# Altium PCB 01_UNROUTED_PLACEMENT.PcbDoc (part 1 of 4)
Units mil, origin at the board's own origin, x right, y up, seen from the top; angles counter-clockwise.
Board outline 3149.61 x 1771.65 mil, 4 copper layers (L1 TOP, L2 GND, L3 POWER SIGNAL, L4 BOTTOM GND), stack 45.835 mil thick; 209 components, 132 nets, 746 pads, 5 vias.
Unrouted connection lines stored in the file: 533.
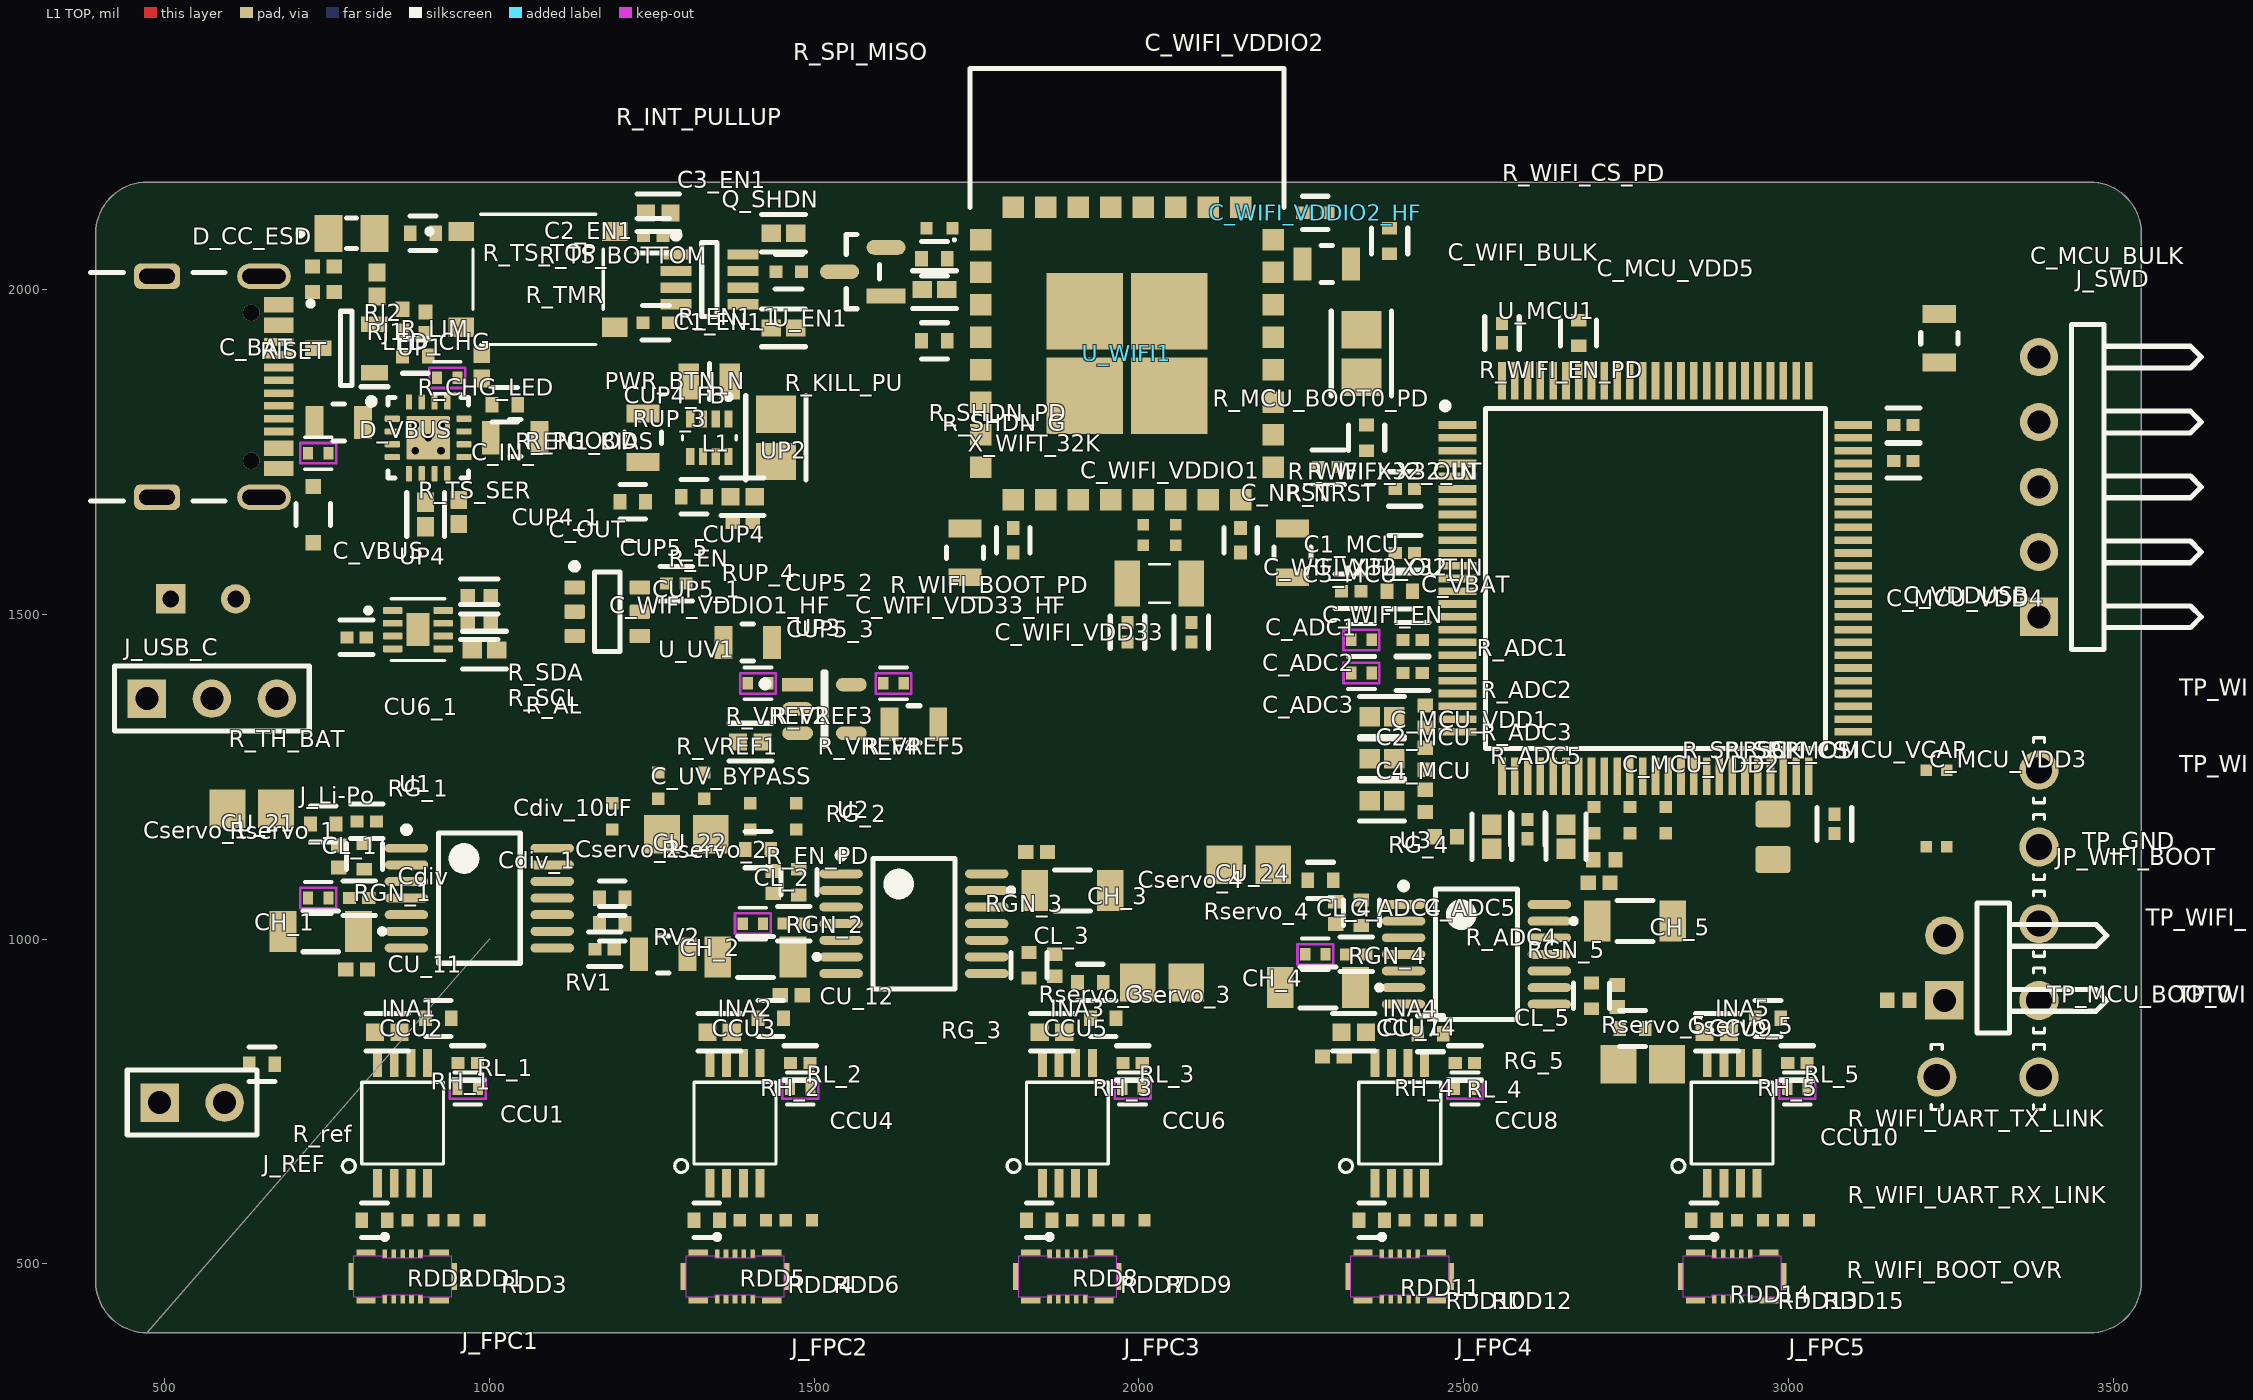
[diagram p0: L1 TOP view]
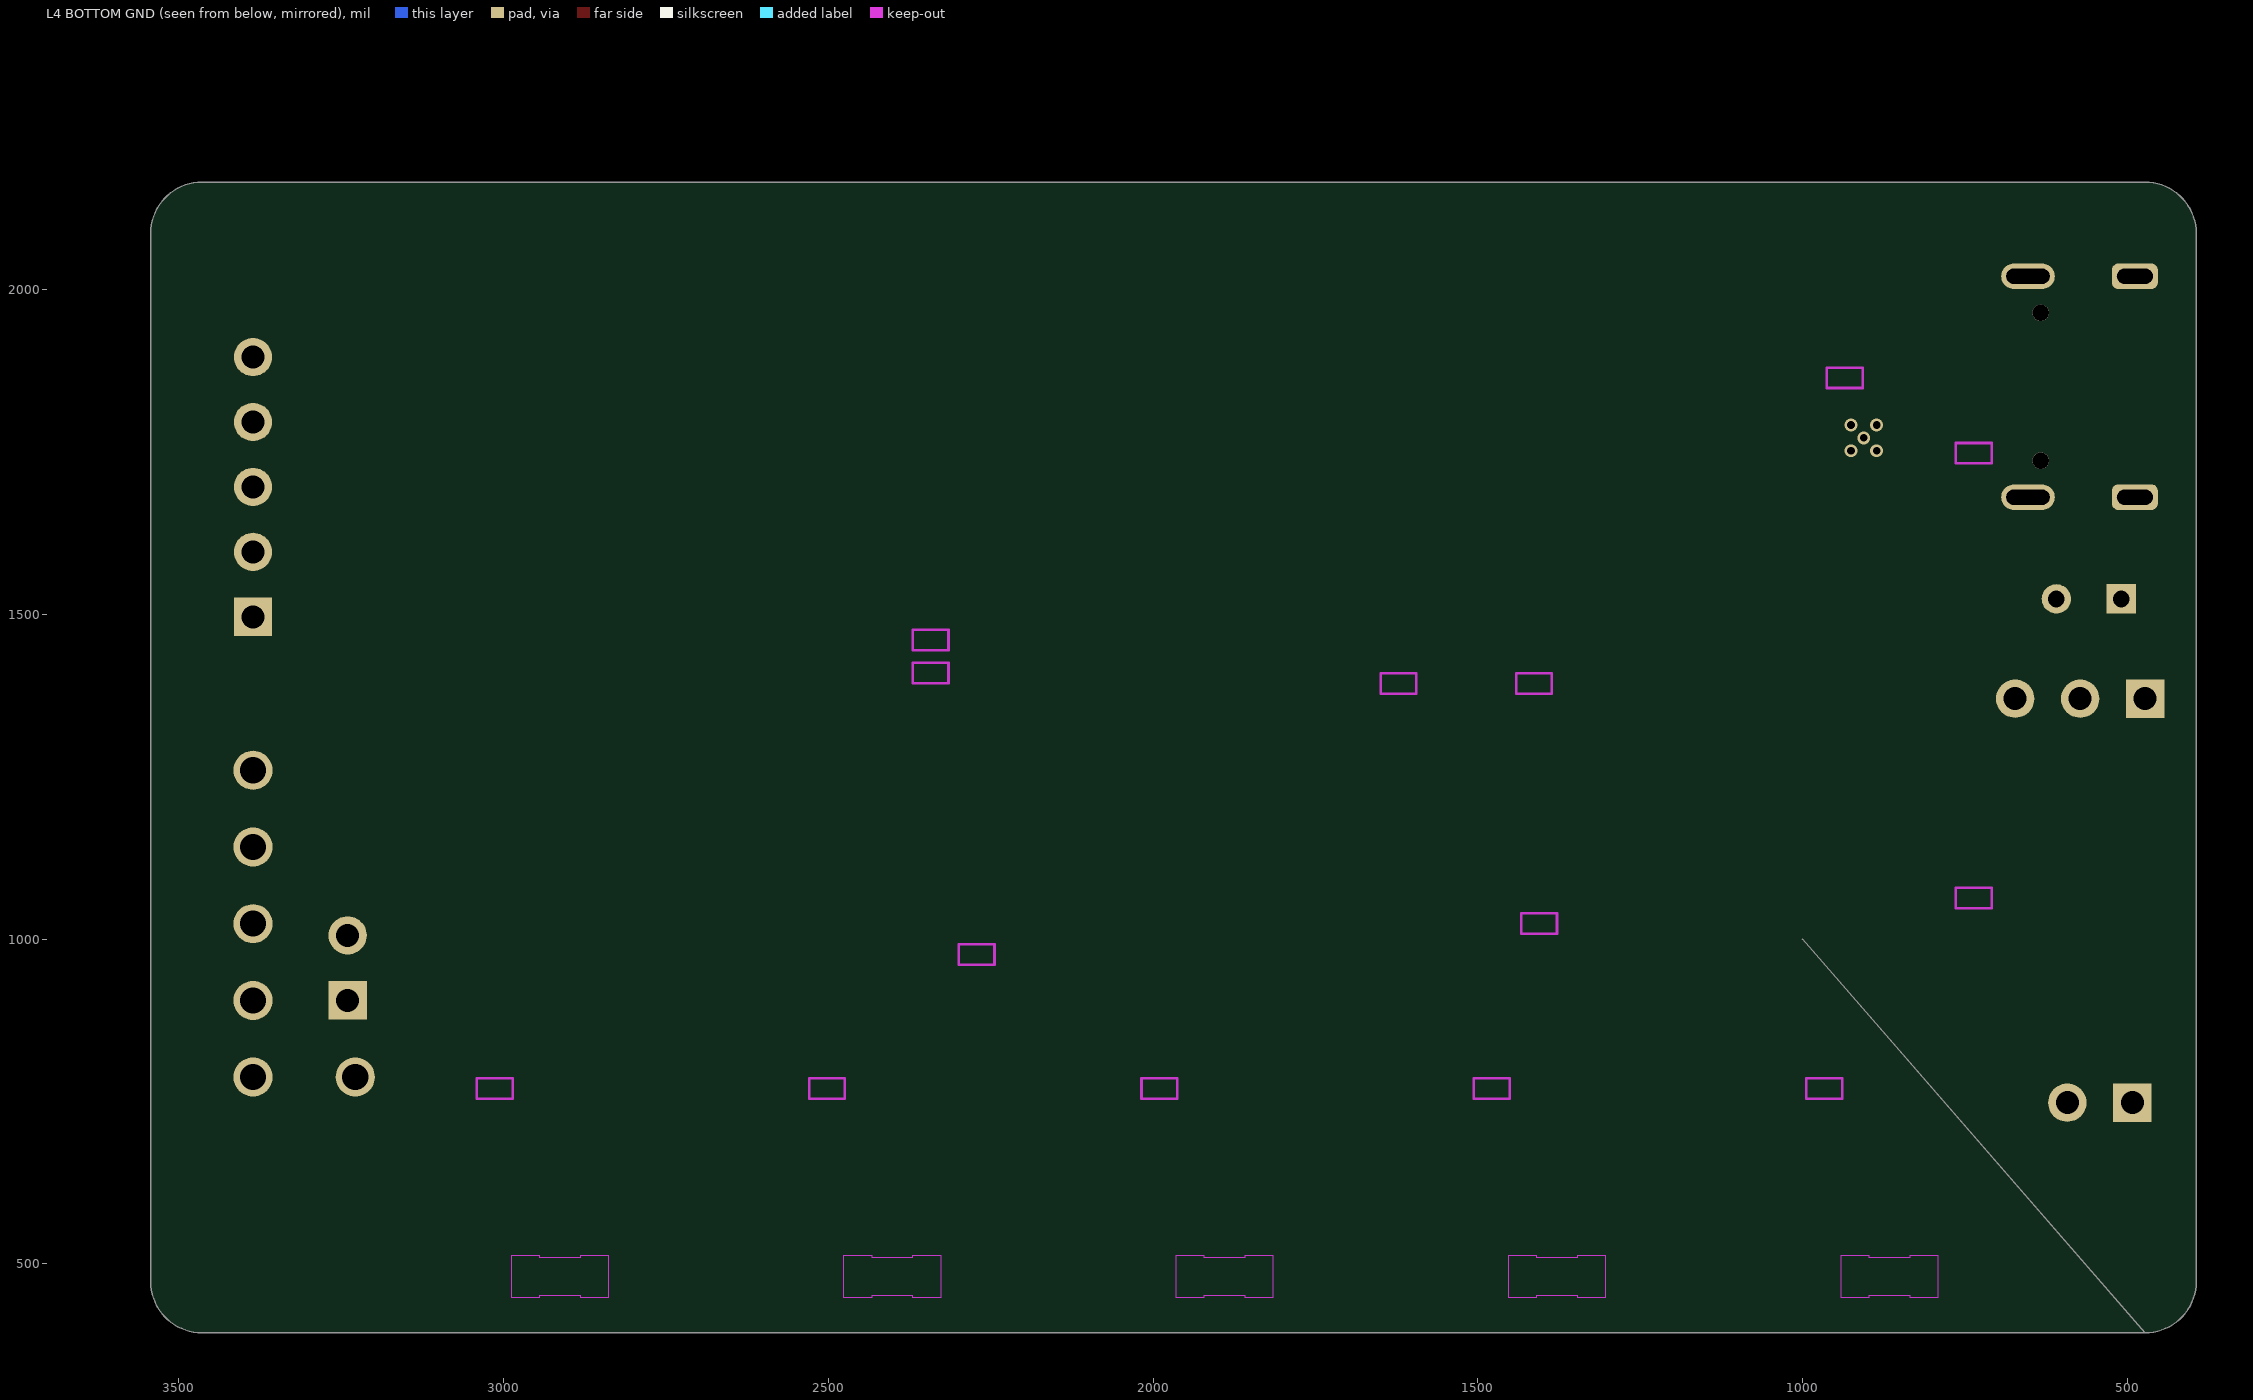
[diagram p1: L4 BOTTOM GND view, seen from below]

## Layer stack, top to bottom
Top Solder: solder mask 0.4, Solder Resist, Dk 3.5
L1 TOP: signal copper 1.378
Dielectric 1: prepreg 3.9134, JLC3313 prepreg, Dk 4.1
L2 GND: signal copper 0.5984
Dielectric2: core 34.0551, JLC core, Dk 4.6
L3 POWER SIGNAL: signal copper 0.5984
Dielectric3: prepreg 3.9134, JLC3313 prepreg, Dk 4.1
L4 BOTTOM GND: signal copper 1.378
Bottom Solder: solder mask 0.4, Solder Resist, Dk 3.5

## Board outline
472.44,393.7 3464.57,393.7 ccw(c3464.57,472.44) 3543.31,472.44 3543.31,2086.61 ccw(c3464.57,2086.61) 3464.57,2165.35 472.44,2165.35 ccw(c472.44,2086.61) 393.7,2086.61 393.7,472.44 ccw(c472.44,472.44) 1000,1000

## Design rules (kind name [scope] priority, off if disabled: settings)
Clearance [All] p1: gap=10 ignorepadtopadclearanceinfootprint=FALSE except(0: Arc-Hole Track-Hole SMDPad-Hole THPad-Hole Via-Hole Fill-Hole Poly-Hole Region-Hole Text-Hole)
PolygonConnect [All] p1: connectstyle=Relief reliefconductorwidth=10 reliefentries=4 polygonreliefangle="90 Angle" airgapwidth=10
RoutingVias [All] p1: holewidth=28 width=50 viastyle="Through Hole" minholewidth=28 minwidth=50 maxholewidth=28 maxwidth=50
SolderMaskExpansion [All] p1: expansion=4 istentingtop=FALSE
Width [All] p1: maxlimit=10 minlimit=10 preferedwidth=10
30 further rules are at their usual default settings.

## Components (designator, comment, footprint, x,y, rotation, side; value= is the part's Value field where it differs from the comment)
C1_EN1 "GRM155R61C104KA88D" FP-GRM155-0_05-IPC_C 1251.97,2082.68 r0 top
C1_MCU "GRM155R61C104KA88D" FP-GRM155-0_05-IPC_C 2421.26,1460.63 r180 top
C2_EN1 "CC0402KRX7R7BB333" FP-CC0402-MFG 1255.91,1948.82 r180 top value="33 nF"
C2_MCU "MURATA_GRM155C71C105KE11D" *MURATA_GRM155C71C105KE11D_0 2342.52,1460.63 r0 top value="1 uF"
C3_EN1 "CC0402KRX5R6BB334" FP-CC0402-MFG 1460.63,2027.56 r180 top value="330 nF"
C3_MCU "GRM155R61C104KA88D" FP-GRM155-0_05-IPC_C 2421.26,1409.45 r180 top
C4_MCU "MURATA_GRM155C71C105KE11D" *MURATA_GRM155C71C105KE11D_0 2342.52,1409.45 r0 top value="1 uF"
C_ADC1 "GRM1555C1E103JE01D" FP-GRM155-0_15-IPC_A 2374.02,1342.52 r180 top
C_ADC2 "GRM1555C1E103JE01D" FP-GRM155-0_15-IPC_A 2374.02,1277.56 r180 top
C_ADC3 "GRM1555C1E103JE01D" FP-GRM155-0_15-IPC_A 2374.02,1212.6 r180 top
C_ADC4 "GRM1555C1E103JE01D" FP-GRM155-0_15-IPC_A 2543.31,1157.48 r270 top
C_ADC5 "GRM1555C1E103JE01D" FP-GRM155-0_15-IPC_A 2657.48,1157.48 r270 top
C_BAT "GCM21BC71E106KE36L" FP-GCM21B-0_2-e0_2_0_7-MFG 767.72,1795.28 r180 top
C_IN_ "GRM155C71C105KE11D" *MURATA_GRM155C71C105KE11D_0 935.04,1864.17 r0 top value="1 uF"
C_MCU_BULK "GCM21BC71E106KE36L" FP-GCM21B-0_2-e0_2_0_7-MFG 3232.28,1925.2 r90 top
C_MCU_VDD1 "GRM155R61C104KA88D" FP-GRM155-0_05-IPC_C 2409.45,1594.49 r0 top
C_MCU_VDD2 "GRM155R61C104KA88D" FP-GRM155-0_05-IPC_C 2598.43,1169.29 r90 top
C_MCU_VDD3 "GRM155R61C104KA88D" FP-GRM155-0_05-IPC_C 3070.87,1177.17 r90 top
C_MCU_VDD4 "GRM155R61C104KA88D" FP-GRM155-0_05-IPC_C 3177.17,1791.34 r0 top
C_MCU_VDD5 "GRM155R61C104KA88D" FP-GRM155-0_05-IPC_C 2559.06,1933.07 r90 top
C_NRST "GRM155R61C104KA88D" FP-GRM155-0_05-IPC_C 2326.77,1535.43 r180 top
C_OUT_ "GCM21BC71E106KE36L" FP-GCM21B-0_2-e0_2_0_7-MFG 1039.37,1771.65 r0 top
C_UV_BYPASS "GRM155R61C104KA88D" FP-GRM155-0_05-IPC_C 1287.4,1547.24 r0 top
C_VBAT "GRM155R61C104KA88D" FP-GRM155-0_05-IPC_C 2409.45,1692.91 r0 top
C_VBUS "GRM155C71C105KE11D" *MURATA_GRM155C71C105KE11D_0 736.22,1748.03 r0 top value="1 uF"
C_VDDUSB "GRM155R61C104KA88D" FP-GRM155-0_05-IPC_C 3177.17,1736.22 r0 top
C_WIFI_BULK "GRM219R60J476ME44D" FP-GRM219-0_2-0_1-IPC_A 2342.52,1901.57 r90 top
C_WIFI_EN "GRM155R61C104KA88D" FP-GRM155-0_05-IPC_C 2291.34,1726.57 r0 top
C_WIFI_VDD33 "GCM21BC71E106KE36L" FP-GCM21B-0_2-e0_2_0_7-MFG 2236.22,1594.49 r270 top
C_WIFI_VDD33_HF "GRM155R61C104KA88D" FP-GRM155-0_05-MFG 2156.5,1614.17 r270 top
C_WIFI_VDDIO1 "GCM21BC71E106KE36L" FP-GCM21B-0_2-e0_2_0_7-MFG 1732.28,1594.49 r90 top
C_WIFI_VDDIO1_HF "GRM155R61C104KA88D" FP-GRM155-0_05-MFG 1806.5,1614.17 r270 top
C_WIFI_VDDIO2 "GCM21BC71E106KE36L" FP-GCM21B-0_2-e0_2_0_7-MFG 2289.37,2039.37 r180 top
C_WIFI_VDDIO2_HF "GRM155R61C104KA88D" FP-GRM155-0_05-MFG 2271.65,2118.11 r180 top
C_WIFI_X32_IN "DNP" FP-GRM155-0_05-IPC_C 2080.71,1472.44 r90 top value="DNP - tuning"
C_WIFI_X32_OUT "DNP" FP-GRM155-0_05-IPC_C 1982.28,1472.44 r90 top value="DNP - tuning"
CCU1 "GRM155R61C104KA88D" FP-GRM155-0_05-IPC_C 966.54,809.06 r0 top
CCU2 "MURATA_GRM155C71C105KE11D" *MURATA_GRM155C71C105KE11D_0 966.54,769.68 r180 top value="1 uF"
CCU3 "MURATA_GRM155C71C105KE11D" *MURATA_GRM155C71C105KE11D_0 1478.35,769.68 r180 top value="1 uF"
CCU4 "GRM155R61C104KA88D" FP-GRM155-0_05-IPC_C 1478.35,809.06 r0 top
CCU5 "MURATA_GRM155C71C105KE11D" *MURATA_GRM155C71C105KE11D_0 1990.16,769.68 r180 top value="1 uF"
CCU6 "GRM155R61C104KA88D" FP-GRM155-0_05-IPC_C 1990.16,809.06 r0 top
CCU7 "MURATA_GRM155C71C105KE11D" *MURATA_GRM155C71C105KE11D_0 2501.97,769.68 r180 top value="1 uF"
CCU8 "GRM155R61C104KA88D" FP-GRM155-0_05-IPC_C 2501.97,809.06 r0 top
CCU9 "MURATA_GRM155C71C105KE11D" *MURATA_GRM155C71C105KE11D_0 3013.78,769.68 r180 top value="1 uF"
CCU10 "GRM155R61C104KA88D" FP-GRM155-0_05-IPC_C 3013.78,809.06 r0 top
Cdiv "GRM155R61C104KA88D" FP-GRM155-0_05-IPC_C 811.02,1181.1 r0 top
Cdiv_1 "GRM155R61C104KA88D" FP-GRM155-0_05-IPC_C 1177.17,984.25 r180 top
Cdiv_10uF "GCM21BC71E106KE36L" FP-GCM21B-0_2-e0_2_0_7-MFG 1267.72,976.38 r180 top
CH_1 "GRM1555C1H392GE01D" CAPC1005X55N 767.72,1126.97 r270 top
CH_2 "GRM1555C1H392GE01D" CAPC1005X55N 1437.01,1087.6 r270 top
CH_3 "GRM1555C1H392GE01D" CAPC1005X55N 1870.08,959.65 r90 top
CH_4 "GRM1555C1H392GE01D" CAPC1005X55N 2303.15,1040.35 r270 top
CH_5 "GRM1555C1H392GE01D" CAPC1005X55N 2736.22,912.4 r90 top
CL_1 "GRM21BR71C824KA01L" CAPC2013X135X45ML10T25 633.86,1200.79 r0 top
CL_2 "GRM21BR71C824KA01L" CAPC2013X135X45ML10T25 1303.15,1161.42 r0 top
CL_3 "GRM21BR71C824KA01L" CAPC2013X135X45ML10T25 2035.43,933.07 r180 top
CL_4 "GRM21BR71C824KA01L" CAPC2013X135X45ML10T25 2169.29,1114.17 r0 top
CL_5 "GRM21BR71C824KA01L" CAPC2013X135X45ML10T25 2775.59,807.09 r180 top
Cservo_1 "GRM31CR71E335KA88L" GRM31x 740.16,1011.81 r180 top
Cservo_2 "GRM31CR71E335KA88L" GRM31x 1409.45,972.44 r180 top
Cservo_3 "GRM31CR71E335KA88L" GRM31x 1897.64,1074.8 r0 top
Cservo_4 "GRM31CR71E335KA88L" GRM31x 2275.59,925.2 r180 top
Cservo_5 "GRM31CR71E335KA88L" GRM31x 2763.78,1027.56 r0 top
CU6_1 "GRM155R61C104KA88D" FP-GRM155-0_05-IPC_C 795.28,1464.57 r0 top
CU_11 "GRM155R61C104KA88D" FP-GRM155-0_05-IPC_C 799.21,1062.99 r0 top
CU_12 "GRM155R61C104KA88D" FP-GRM155-0_05-IPC_C 1468.5,1023.62 r0 top
CU_14 "GRM155R61C104KA88D" FP-GRM155-0_05-IPC_C 2334.65,976.38 r0 top
CU_21 "MURATA_GRM155C71C105KE11D" *MURATA_GRM155C71C105KE11D_0 736.22,1062.99 r180 top value="1 uF"
CU_22 "MURATA_GRM155C71C105KE11D" *MURATA_GRM155C71C105KE11D_0 1405.51,1023.62 r180 top value="1 uF"
CU_24 "MURATA_GRM155C71C105KE11D" *MURATA_GRM155C71C105KE11D_0 2271.65,976.38 r180 top value="1 uF"
CUP4 "GRM219R60J476ME44D" FP-GRM219-0_2-0_1-IPC_A 1440.94,1771.65 r270 top
CUP4_1 "GCM21BC71E106KE36L" FP-GCM21B-0_2-e0_2_0_7-MFG 1236.22,1771.65 r270 top
CUP4_FB "GRM1555C1H100JA01D" CAPC1005X55X25LL05T10 1389.76,1641.73 r180 top
CUP5_1 "GRM155C71C105KE11D" *MURATA_GRM155C71C105KE11D_0 1413.39,1393.7 r180 top value="1 uF"
CUP5_2 "GRM155C71C105KE11D" *MURATA_GRM155C71C105KE11D_0 1622.05,1393.7 r180 top value="1 uF"
CUP5_3 "GCM21BC71E106KE36L" FP-GCM21B-0_2-e0_2_0_7-MFG 1653.54,1330.71 r180 top
CUP5_5 "GCM21BC71E106KE36L" FP-GCM21B-0_2-e0_2_0_7-MFG 1397.64,1456.69 r180 top
D_CC_ESD "PESD5V0X2UTR" SOT95P230X100-3N 779.53,1909.45 r180 top
D_VBUS "PESD5V0S1BA,115" FP-SOD323-CA-MFG 728.35,1653.54 r90 top
INA1 "AD8237ARMZ" EMG_AD8237_R3_MSOP8 866.14,716.54 r0 top
INA2 "AD8237ARMZ" EMG_AD8237_R3_MSOP8 1377.95,716.54 r0 top
INA3 "AD8237ARMZ" EMG_AD8237_R3_MSOP8 1889.76,716.54 r0 top
INA4 "AD8237ARMZ" EMG_AD8237_R3_MSOP8 2401.57,716.54 r0 top
INA5 "AD8237ARMZ" EMG_AD8237_R3_MSOP8 2913.39,716.54 r0 top
J_FPC1 "BK13C06-10DS/2-0.35V(895)" HIROSE_BK13C06-10DS/2-0.35V(895) 866.14,480.31 r0 top
J_FPC2 "BK13C06-10DS/2-0.35V(895)" HIROSE_BK13C06-10DS/2-0.35V(895) 1377.95,480.31 r0 top
J_FPC3 "BK13C06-10DS/2-0.35V(895)" HIROSE_BK13C06-10DS/2-0.35V(895) 1889.76,480.31 r0 top
J_FPC4 "BK13C06-10DS/2-0.35V(895)" HIROSE_BK13C06-10DS/2-0.35V(895) 2401.57,480.31 r0 top
J_FPC5 "BK13C06-10DS/2-0.35V(895)" HIROSE_BK13C06-10DS/2-0.35V(895) 2913.39,480.31 r0 top
J_Li-Po "Header 3" HDR1X3 472.44,1370.08 r0 top
J_REF "REFERENCE ELECTRODE:" HDR1X2 492.13,748.03 r0 top
J_SWD "Header 5H" HDR1X5H 3385.83,1496.06 r90 top
J_USB_C "USB4105-GF-A-060" GCT_USB4105-GF-A-060 488.19,1850.39 r270 top
JP_WIFI_BOOT "Header 2H" HDR1X2H 3240.16,905.51 r90 top
L1 "DFE21CCN1R0MELL" FP-DFE21CC_EL-MFG 1338.58,1858.27 r180 top
LED_CHG "SML-LXT0805SRW-TR" LEDC2012X120N 787.4,2086.61 r0 top
MCU_VCAP "CL21A475KOFNNNE" CAPC2012X135N 2976.38,1157.48 r90 top
PWR_BTN_N "TS-1187A-B-A-B" SW_TS-1187A-B-A-B 1074.8,2015.75 r0 top
Q_SHDN "BSS138" FP-318-08-IPC_B 1574.8,2027.56 r180 top
R_ADC1 "0402WGF3300TCE" RESC1005X40N 2440.94,1342.52 r90 top
R_ADC2 "0402WGF3300TCE" RESC1005X40N 2440.94,1277.56 r90 top
R_ADC3 "0402WGF3300TCE" RESC1005X40N 2440.94,1212.6 r90 top
R_ADC4 "0402WGF3300TCE" RESC1005X40N 2472.44,1157.48 r0 top
R_ADC5 "0402WGF3300TCE" RESC1005X40N 2716.54,1122.05 r180 top
R_AL "AT0402DRD0710KL" FP-AT0402-IPC_A 992.13,1444.88 r0 top
R_CHG_LED "AC0402FR-071K5L" FP-AC0402-MFG 897.64,2086.61 r0 top
R_EN "AC0402FR-7D100KL" FP-AC0402-MFG 1220.47,1673.23 r0 top value=100KΩ
R_EN1_1 "RC0402FR-071KL" FP-RC0402-0_4-IPC_A 1259.84,2118.11 r0 top
R_EN1_BIAS "AT0402DRD0710KL" FP-AT0402-IPC_A 901.57,1653.54 r90 top
R_EN_PD "AC0402FR-071ML" FP-AC0402-IPC_A 1401.57,1303.15 r0 top
R_INT_PULLUP "AT0402DRD0710KL" FP-AT0402-IPC_A 1452.76,1940.94 r180 top
R_KILL_PU "AT0402DRD0710KL" FP-AT0402-IPC_A 1452.76,2086.61 r0 top
R_LIM "AC0402FR-073K48L" FP-AC0402-MFG 1023.62,1822.83 r180 top
R_MCU_BOOT0_PD "RT0402BRD0710KL" FP-RT0402-MFG 2677.17,1933.07 r270 top value=10KΩ
R_NRST "RT0402BRD0710KL" FP-RT0402-MFG 2401.57,1535.43 r180 top value=10KΩ
R_PGOOD "RC0402FR-0747KL" RESC1005X40X25ML05T10 952.76,1657.48 r90 top
R_ref "AC0402FR-7D100KL" FP-AC0402-MFG 649.61,807.09 r0 top value=100KΩ
R_SCL "CRCW04024K70FKED" FP-CRCW0402-e3-IPC_B 984.25,1488.19 r0 top
R_SDA "CRCW04024K70FKED" FP-CRCW0402-e3-IPC_B 984.25,1527.56 r0 top
R_SHDN_G "AT0402DRD0710KL" FP-AT0402-IPC_A 1685.04,2000 r0 top
R_SHDN_PD "AC0402FR-7D100KL" FP-AC0402-MFG 1685.04,2047.24 r0 top value=100KΩ
R_SPI_CS "ERJ2RKF22R0X" RES_ERJ2RKF22R0X 2811.02,1183.07 r90 top
R_SPI_MISO "ERJ2RKF22R0X" RES_ERJ2RKF22R0X 1692.91,2094.49 r180 top
R_SPI_MOSI "ERJ2RKF22R0X" RES_ERJ2RKF22R0X 2755.91,1183.07 r90 top
R_SPI_SCK "ERJ2RKF22R0X" RES_ERJ2RKF22R0X 2700.79,1183.07 r90 top
R_TH_BAT "103AT-2" EMG_REMOTE_NTC_TERMINALS_2P 559.06,1523.62 r0 top
R_TMR "RC0402FR-0768K1L" RESC1005X40X25ML05T10 988.19,1881.89 r90 top
R_TS_BOTTOM "RC0402FR-0728KL" RESC1005X40X25NL05T10 901.57,1948.82 r90 top
R_TS_SER "AC0402FR-7D100KL" FP-AC0402-MFG 885.83,1897.64 r0 top value=100KΩ
R_TS_TOP "RC0402FR0733K2L" RESC1005X40X25NL05T10 866.14,1952.76 r90 top
R_VREF1 "ERA2AEB680X" RES_ERA2AEB680X 1188.98,1188.98 r90 top
R_VREF2 "ERA2AEB680X" RES_ERA2AEB680X 1259.84,1236.22 r90 top
R_VREF3 "ERA2AEB680X" RES_ERA2AEB680X 1330.71,1236.22 r90 top
R_VREF4 "ERA2AEB680X" RES_ERA2AEB680X 1401.57,1188.98 r90 top
R_VREF5 "ERA2AEB680X" RES_ERA2AEB680X 1472.44,1188.98 r90 top
R_WIFI_BOOT_OVR "0402WGF1001TCE" RESC1005X40N 3169.29,905.51 r0 top
R_WIFI_BOOT_PD "RT0402BRD0710KL" FP-RT0402-MFG 1685.04,1921.26 r0 top value=10KΩ
R_WIFI_CS_PD "RT0402BRD0710KL" FP-RT0402-MFG 2385.83,2074.8 r90 top value=10KΩ
R_WIFI_EN_PD "RT0402BRD0710KL" FP-RT0402-MFG 2350.39,1771.65 r90 top value=10KΩ
R_WIFI_UART_RX_LINK "ERJ2GE0R00X" RESC1005X40X25LL05T05 3228.35,1141.73 r0 top
R_WIFI_UART_TX_LINK "ERJ2GE0R00X" RESC1005X40X25LL05T05 3228.35,1259.84 r0 top
R_WIFI_X32_IN "ERJ2GE0R00X" RESC1005X40X25LL05T05 2056.5,1622.05 r90 top
R_WIFI_X32_OUT "ERJ2GE0R00X" RESC1005X40X25LL05T05 2006.5,1622.05 r90 top
RDD1 "ERA2ARB103X" RES_ERA2ARB103X 893.7,566.93 r0 top
RDD2 "AR02BTC5001" FP-AC0402-MFG 822.83,566.93 r0 top value=5KΩ
RDD3 "ERA2ARB103X" RES_ERA2ARB103X 964.57,566.93 r0 top
RDD4 "ERA2ARB103X" RES_ERA2ARB103X 1405.51,566.93 r0 top
RDD5 "AR02BTC5001" FP-AC0402-MFG 1334.65,566.93 r0 top value=5KΩ
RDD6 "ERA2ARB103X" RES_ERA2ARB103X 1476.38,566.93 r0 top
RDD7 "ERA2ARB103X" RES_ERA2ARB103X 1917.32,566.93 r0 top
RDD8 "AR02BTC5001" FP-AC0402-MFG 1846.46,566.93 r0 top value=5KΩ
RDD9 "ERA2ARB103X" RES_ERA2ARB103X 1988.19,566.93 r0 top
RDD10 "ERA2ARB103X" RES_ERA2ARB103X 2429.13,566.93 r0 top
RDD11 "AR02BTC5001" FP-AC0402-MFG 2358.27,566.93 r0 top value=5KΩ
RDD12 "ERA2ARB103X" RES_ERA2ARB103X 2500,566.93 r0 top
RDD13 "ERA2ARB103X" RES_ERA2ARB103X 2940.94,566.93 r0 top
RDD14 "AR02BTC5001" FP-AC0402-MFG 2870.08,566.93 r0 top value=5KΩ
RDD15 "ERA2ARB103X" RES_ERA2ARB103X 3011.81,566.93 r0 top
RG_1 "RT0402BRD0780K6L" FP-RT0402-MFG 807.09,1126.97 r90 top value=80.6KΩ
RG_2 "RT0402BRD0780K6L" FP-RT0402-MFG 1476.38,1087.6 r90 top value=80.6KΩ
RG_3 "RT0402BRD0780K6L" FP-RT0402-MFG 1830.71,959.65 r270 top value=80.6KΩ
RG_4 "RT0402BRD0780K6L" FP-RT0402-MFG 2342.52,1040.35 r90 top value=80.6KΩ
RG_5 "RT0402BRD0780K6L" FP-RT0402-MFG 2696.85,912.4 r270 top value=80.6KΩ
RGN_1 "RT0402BRD0710KL" FP-RT0402-MFG 744.09,1177.17 r0 top value=10KΩ
RGN_2 "RT0402BRD0710KL" FP-RT0402-MFG 1413.39,1137.8 r0 top value=10KΩ
RGN_3 "RT0402BRD0710KL" FP-RT0402-MFG 1925.2,933.07 r180 top value=10KΩ
RGN_4 "RT0402BRD0710KL" FP-RT0402-MFG 2279.53,1090.55 r0 top value=10KΩ
RGN_5 "RT0402BRD0710KL" FP-RT0402-MFG 2759.84,862.2 r180 top value=10KΩ
RH_1 "ERA-2AEB2612X" FP-AC0402-IPC_A 842.52,856.3 r0 top
RH_2 "ERA-2AEB2612X" FP-AC0402-IPC_A 1354.33,856.3 r0 top
RH_3 "ERA-2AEB2612X" FP-AC0402-IPC_A 1866.14,856.3 r0 top
RH_4 "ERA-2AEB2612X" FP-AC0402-IPC_A 2330.71,856.3 r0 top
RH_5 "ERA-2AEB2612X" FP-AC0402-IPC_A 2889.76,856.3 r0 top
RISET "RC0402FR-072K94L" RESC1005X40X25ML05T10 826.77,2007.87 r270 top
RJ1 "RC0402FR-075K1L" RESC1005X40X25NL05T10 744.09,1996.06 r0 top
RJ2 "RC0402FR-075K1L" RESC1005X40X25NL05T10 744.09,2035.43 r0 top
RL_1 "RT0402BRD071K07L" FP-RT0402-MFG 921.26,877.95 r0 top value=1.07KΩ
RL_2 "RT0402BRD071K07L" FP-RT0402-MFG 1433.07,877.95 r0 top value=1.07KΩ
RL_3 "RT0402BRD071K07L" FP-RT0402-MFG 1944.88,877.95 r0 top value=1.07KΩ
RL_4 "RT0402BRD071K07L" FP-RT0402-MFG 2448.82,854.33 r0 top value=1.07KΩ
RL_5 "RT0402BRD071K07L" FP-RT0402-MFG 2968.5,877.95 r0 top value=1.07KΩ
Rservo_1 "RC0402FR-072ML" RESC1005X40X25NL05T10 795.28,952.76 r180 top
Rservo_2 "RC0402FR-072ML" RESC1005X40X25NL05T10 1464.57,913.39 r180 top
Rservo_3 "RC0402FR-072ML" RESC1005X40X25NL05T10 1842.52,1133.86 r0 top
Rservo_4 "RC0402FR-072ML" RESC1005X40X25NL05T10 2299.21,818.9 r180 top
Rservo_5 "RC0402FR-072ML" RESC1005X40X25NL05T10 2708.66,1086.61 r0 top
RUP_3 "AC0402FR-07560KL" FP-AC0402-IPC_A 1389.76,1681.1 r180 top
RUP_4 "AC0402FR-7D100KL" FP-AC0402-MFG 1314.96,1681.1 r0 top value=100KΩ
RV1 "AC0402FR-7D100KL" FP-AC0402-MFG 1188.98,1023.62 r180 top value=100KΩ
RV2 "AC0402FR-7D100KL" FP-AC0402-MFG 1188.98,1062.99 r0 top value=100KΩ
TP_GND "5021" TP_5021 3385.83,1023.62 r90 top
TP_MCU_BOOT0 "5021" TP_5021 3228.35,787.4 r90 top
TP_WIFI_BOOT "5021" TP_5021 3385.83,905.51 r90 top
TP_WIFI_CHIP_EN "5021" TP_5021 3385.83,787.4 r90 top
TP_WIFI_UART_RX "5021" TP_5021 3385.83,1259.84 r90 top
TP_WIFI_UART_TX "5021" TP_5021 3385.83,1141.73 r90 top
U1 "MCP6404T-E/ST" TSSOP-ST14_N 984.25,1062.99 r0 top
U2 "MCP6404T-E/ST" TSSOP-ST14_N 1653.54,1023.62 r0 top
U3 "MCP6404T-E/ST" TSSOP-ST14_N 2519.68,976.38 r0 top
U_EN1 "LTC2954ITS8-1#TRMPBF" LT-TS8-8-TSOT-23_V 1338.58,2015.75 r0 top
U_MCU1 "STM32U575VIT6" QFP50P1600X1600X160-100N 2795.28,1555.12 r0 top
U_UV1 "TPS3808G33DBVR" DBV0006A_L 1181.1,1503.94 r0 top
U_WIFI1 "ST67W611M1A6BTR" ST67W611M1A6BTR 1968.5,2000 r0 top
UP1 "BQ24072TRGTR" RGT0016C_V 905.51,1771.65 r0 top
UP2 "TPS631000DRLR" SOT50P160X60-8N 1338.58,1771.65 r270 top
UP3 "TPS7A2030PDBVR" FP-DBV0005A-IPC_C 1515.75,1354.33 r0 top
UP4 "MAX17048G+T10" SON50P200X200X80-9N 889.76,1476.38 r0 top
X_WIFI_32K "Q13FC13500003" EMG_FC135_3215_2P 2031.5,1547.24 r180 top value="32.768 kHz"

## Footprints (in the part's own frame and the unit in brackets; to place one, negate y for a bottom-side part, rotate by r counter-clockwise, add the part's x,y. Pads: shape width x height; smd on the part's side, far side on the other; paste and mask are expansions set on the pad)
*MURATA_GRM155C71C105KE11D_0 [mm]
  rect 0.4x0.5 smd: 1(-0.4,0) 2(0.4,0)
  Keep-Out Layer lines w0.1: -0.7,-0.4 0.7,-0.4 ; -0.7,-0.4 -0.7,0.4 ; -0.7,-0.4 0.7,-0.4 ; -0.7,-0.4 -0.7,0.4 ; -0.7,-0.4 0.7,-0.4 ; -0.7,-0.4 -0.7,0.4 ; -0.7,0.4 0.7,0.4 ; -0.7,0.4 0.7,0.4 ; -0.7,0.4 0.7,0.4 ; 0.7,-0.4 0.7,0.4 ; 0.7,-0.4 0.7,0.4 ; 0.7,-0.4 0.7,0.4
  silkscreen extent -0.53,-0.63 0.53,0.63
CAPC1005X55N [mm]
  rect 0.54x0.6 smd paste+0 mask+0.102: 1(-0.432,0) 2(0.432,0)
  body extent -0.5,-0.25 0.5,0.25, height 0.55
CAPC1005X55X25LL05T10 [mm] "Chip Capacitor, 2-Leads, Body 1.00x0.50mm, IPC High Density"
  rect 0.56x0.52 smd: 1(-0.39,0) 2(0.39,0)
  body extent -0.53,-0.28 0.53,0.28, height 0.55
CAPC2012X135N [mm]
  rrect25% 1.05x1.38 smd paste+0 mask+0.102: 1(-0.888,0) 2(0.888,0)
  body extent -1,-0.63 1,0.63, height 1.35
CAPC2013X135X45ML10T25 [mm] "Chip Capacitor, 2-Leads, Body 2.00x1.25mm, IPC Low Density"
  rect 1.4x1.5 smd: 1(-0.95,0) 2(0.95,0)
  body extent -1.05,-0.67 1.05,0.67, height 1.35
DBV0006A_L [mm] "SOT23, 6-Leads, Body 3.05x1.75mm, Pitch 0.95mm, IPC High Density"
  rrect18% 0.8x0.55 smd: 1(-1.275,0.95) 2(-1.275,0) 3(-1.275,-0.95) 4(1.275,-0.95) 5(1.275,0) 6(1.275,0.95)
  silkscreen extent -1.4,-1.55 0.5,1.9, body extent -1.42,-1.46 1.42,1.46, height 1.11
EMG_AD8237_R3_MSOP8 [mm] "AD8237ARMZ RM-8; numeric pin mapping 1-8; R3 2026-09-12; geometry retained from inspected source"
  rect 0.35x1.1 smd mask+0.05: 1(-0.975,-2.35) 2(-0.325,-2.35) 3(0.325,-2.35) 4(0.975,-2.35) 5(0.975,2.35) 6(0.325,2.35) 7(-0.325,2.35) 8(-0.975,2.35)
  silkscreen extent -2.36,-1.93 1.6,1.6, body extent -2.45,-1.5 2.45,1.5, height 1.1
EMG_FC135_3215_2P [mm] "Epson Q13FC13500003 FC-135, 3.2x1.5mm, two numeric pads; preserved 1.0x1.8mm lands at 2.5mm pitch"
  rect 1x1.8 smd: 1(-1.25,0) 2(1.25,0)
  silkscreen extent -0.4,-0.75 0.4,0.75, body extent 0,0 0,0
EMG_REMOTE_NTC_TERMINALS_2P [mm] "Wire-termination provision ONLY. Copper/drill copied unchanged from FP-103AT-2-MFG. Remote sensor body excluded; wire fit and strain relief require qualification."
  rect 1.15x1.15 hole 0.65 paste-1000 mask+0: 1(-1.27,0)
  round 1.15 hole 0.65 paste-1000 mask+0: 2(1.27,0)
FP-318-08-IPC_B [mm]
  rect 1.524x0.578 smd paste+0 mask+0: 1(-0.91,0.95)
  rrect100% 1.524x0.578 smd paste+0 mask+0: 2(-0.91,-0.95) 3(0.91,0)
  silkscreen extent -0.65,-1.45 0.65,1.45, body extent -1.92,-1.7 1.92,1.7, height 0.25
FP-AC0402-IPC_A [mil]
  rect 28.16x26.48 smd paste+0 mask+0: 1(-18.84,0) 2(18.84,0)
  silkscreen extent -33,-29 33,29, body extent -41,-21 41,21, height 10
FP-AC0402-MFG [mm]
  rect 0.5x0.6 smd paste+0 mask+0: 1(-0.5,0) 2(0.5,0)
  silkscreen extent -0.5,-0.67 0.5,0.67, body extent -0.85,-0.4 0.85,0.4, height 0.25
FP-AT0402-IPC_A [mil]
  rect 29.91x26.48 smd paste+0 mask+0: 1(-18.75,0) 2(18.75,0)
  silkscreen extent -34,-29 34,29, body extent -42,-21 42,21, height 10
FP-CC0402-MFG [mm]
  rect 0.5x0.5 smd paste+0 mask+0: 1(-0.5,0) 2(0.5,0)
  silkscreen extent -0.53,-0.68 0.53,0.67, body extent -0.87,-0.48 0.87,0.48, height 0.25
FP-CRCW0402-e3-IPC_B [mil]
  rect 22.37x22.54 smd paste+0 mask+0: 1(-17.8,0) 2(17.8,0)
  silkscreen extent -29,-27 29,27, body extent -35,-17 35,17, height 10
FP-DBV0005A-IPC_C [mm]
  rect 1.205x0.532 smd paste+0 mask+0: 1(-1.05,0.95)
  rrect100% 1.205x0.532 smd paste+0 mask+0: 2(-1.05,0) 3(-1.05,-0.95) 4(1.05,-0.95) 5(1.05,0.95)
  silkscreen extent -2.45,-1.45 0.05,1.45, body extent -1.75,-1.55 1.75,1.55, height 0.25
FP-DFE21CC_EL-MFG [mm]
  rect 0.8x1.4 smd paste+0 mask+0: 1(0.8,0) 2(-0.8,0)
  silkscreen extent 0,-0.7 0,0.7, body extent -1.3,-0.8 1.3,0.8, height 0.25
FP-GCM21B-0_2-e0_2_0_7-MFG [mm]
  rect 0.7x1.3 smd paste+0 mask+0: 1(-0.95,0) 2(0.95,0)
  silkscreen extent -0.23,-0.72 0.23,0.72, body extent -1.4,-0.82 1.4,0.82, height 0.25
FP-GRM155-0_05-IPC_C [mil]
  rect 20.29x18.6 smd paste+0 mask+0: 1(-14.9,0) 2(14.9,0)
  silkscreen extent -25,-27 25,27, body extent -29,-15 29,15, height 10
FP-GRM155-0_05-MFG [mm]
  rect 0.55x0.5 smd paste+0 mask+0: 1(-0.475,0) 2(0.475,0)
  silkscreen extent -0.5,-0.65 0.5,0.65, body extent -0.85,-0.38 0.85,0.38, height 0.25
FP-GRM155-0_15-IPC_A [mil]
  rect 31.66x29.85 smd paste+0 mask+0: 1(-18.78,0) 2(18.78,0)
  silkscreen extent -35,-31 35,31, body extent -42,-23 42,23, height 10
FP-GRM219-0_2-0_1-IPC_A [mil]
  rect 57.27x61.27 smd paste+0 mask+0: 1(-36.45,0) 2(36.45,0)
  silkscreen extent -65,-46 65,46, body extent -85,-50 85,50, height 10
FP-RC0402-0_4-IPC_A [mil]
  rect 28.16x26.48 smd paste+0 mask+0: 1(-18.84,0) 2(18.84,0)
  silkscreen extent -33,-29 33,29, body extent -41,-21 41,21, height 10
FP-RT0402-MFG [mm]
  rect 0.5x0.6 smd paste+0 mask+0: 1(-0.5,0) 2(0.5,0)
  silkscreen extent -0.5,-0.71 0.5,0.7, body extent -0.85,-0.4 0.85,0.4, height 0.25
FP-SOD323-CA-MFG [mm]
  rect 0.6x0.6 smd paste-1000 mask+0: 1(-1.1,0) 2(1.1,0)
  silkscreen extent -0.43,-0.67 0.43,0.67, body extent -1.53,-0.82 1.53,0.82, height 0.25
GCT_USB4105-GF-A-060 [mm]
  rect 0.6x1.15 smd: A1_B12(-3.2,4.755) A4_B9(-2.4,4.755) B1_A12(3.2,4.755) B4_A9(2.4,4.755)
  rect 0.3x1.15 smd: A5(-1.25,4.755) A6(-0.25,4.755) A7(0.25,4.755) A8(1.25,4.755) B5(1.75,4.755) B6(0.75,4.755) B7(-0.75,4.755) B8(-1.75,4.755)
  oval 1x2.1 hole 0.6 slot 1.7 at 90 deg: SH1(-4.32,4.18) SH2(4.32,4.18)
  rrect50% 1x1.8 hole 0.6 slot 1.4 at 90 deg: SH3(-4.32,0) SH4(4.32,0)
  round 0.65 hole 0.65 unplated: ""(-2.89,3.68) ""(2.89,3.68)
  silkscreen extent -4.47,-2.6 4.47,6.1, body extent -4.47,-2.6 4.47,5.11, height 3.31
GRM31x [mm] "Murata GRM31CR71E335KA88L 3.3uF 25V X7R 1206; maximum component height 1.8mm; existing lands unchanged"
  rect 1.05x1.6 smd: 1(-1.475,0) 2(1.475,0)
  silkscreen extent -2.5,-0.8 0.7,0.8, body extent -1.6,-0.8 1.6,0.8, height 1
HDR1X2 [mm] "Connector; Header; 2 Position"
  rect 1.5x1.5 hole 0.9: 1(0,0)
  round 1.5 hole 0.9: 2(2.54,0)
  silkscreen extent -1.27,-1.27 3.81,1.27
HDR1X2H [mm] "Connector; Header; 2 Position; Right Angle"
  rect 1.5x1.5 hole 0.9: 1(0,0)
  round 1.5 hole 0.9: 2(2.54,0)
  silkscreen extent -1.27,-6.35 3.81,-1.27
HDR1X3 [mm] "Connector; Header; 3 Position"
  rect 1.5x1.5 hole 0.9: 1(0,0)
  round 1.5 hole 0.9: 2(2.54,0) 3(5.08,0)
  silkscreen extent -1.27,-1.27 6.35,1.27
HDR1X5H [mm] "Connector; Header; 5 Position; Right Angle"
  rect 1.5x1.5 hole 0.9: 1(0,0)
  round 1.5 hole 0.9: 2(2.54,0) 3(5.08,0) 4(7.62,0) 5(10.16,0)
  silkscreen extent -1.27,-6.35 11.43,-1.27
HIROSE_BK13C06-10DS/2-0.35V(895) [mm]
  rect 0.18x0.325 smd paste+0 mask+0.05: 1(-0.7,0.887) 2(-0.35,0.887) 3(0,0.887) 4(0.35,0.887) 5(0.7,0.887) 6(-0.7,-0.887) 7(-0.35,-0.887) 8(0,-0.887) 9(0.35,-0.887) 10(0.7,-0.887)
  rect 0.75x0.235 smd paste+0 mask+0.102: P1_1(-1.435,0.933) P1_3(-1.435,-0.933) P2_1(1.435,0.933) P2_3(1.435,-0.933)
  rect 0.215x1.04 smd paste+0 mask+0.102: P1_2(-2.015,0) P2_2(2.015,0)
  Keep-Out Layer region: 1.907,-0.815 0.79,-0.815 0.79,-0.725 -0.79,-0.725 -0.79,-0.815 -1.907,-0.815 -1.907,0.815 -0.79,0.815 -0.79,0.725 0.79,0.725 0.79,0.815 1.907,0.815
  silkscreen extent -0.8,1.45 -0.6,1.65
LEDC2012X120N [mm]
  rect 1.1x1.45 smd: A(0.9,0) C(-0.9,0)
  silkscreen extent -2.1,-0.6 0.2,0.6, body extent -1,-0.65 1,0.65, height 0.9
LT-TS8-8-TSOT-23_V [mm] "SOT23, 8-Leads, Body 2.9x1.75mm, Pitch 0.65mm"
  rect 1.22x0.4 smd: 1(-1.31,0.975) 2(-1.31,0.325) 3(-1.31,-0.325) 4(-1.31,-0.975) 5(1.31,-0.975) 6(1.31,-0.325) 7(1.31,0.325) 8(1.31,0.975)
  silkscreen extent -1.43,-1.45 0.3,1.85, body extent -0.87,-1.45 0.88,1.45, height 1
QFP50P1600X1600X160-100N [mm]
  rect 1.475x0.3 smd: 1(-7.738,6) 2(-7.738,5.5) 3(-7.738,5) 4(-7.738,4.5) 5(-7.738,4) 6(-7.738,3.5) 7(-7.738,3) 8(-7.738,2.5) 9(-7.738,2) 10(-7.738,1.5) 11(-7.738,1) 12(-7.738,0.5) 13(-7.738,0) 14(-7.738,-0.5) 15(-7.738,-1) 16(-7.738,-1.5) 17(-7.738,-2) 18(-7.738,-2.5) 19(-7.738,-3) 20(-7.738,-3.5) 21(-7.738,-4) 22(-7.738,-4.5) 23(-7.738,-5) 24(-7.738,-5.5) 25(-7.738,-6) 51(7.738,-6) 52(7.738,-5.5) 53(7.738,-5) 54(7.738,-4.5) 55(7.738,-4) 56(7.738,-3.5) 57(7.738,-3) 58(7.738,-2.5) 59(7.738,-2) 60(7.738,-1.5) 61(7.738,-1) 62(7.738,-0.5) 63(7.738,0) 64(7.738,0.5) 65(7.738,1) 66(7.738,1.5) 67(7.738,2) 68(7.738,2.5) 69(7.738,3) 70(7.738,3.5) 71(7.738,4) 72(7.738,4.5) 73(7.738,5) 74(7.738,5.5) 75(7.738,6)
  rect 0.3x1.475 smd: 26(-6,-7.738) 27(-5.5,-7.738) 28(-5,-7.738) 29(-4.5,-7.738) 30(-4,-7.738) 31(-3.5,-7.738) 32(-3,-7.738) 33(-2.5,-7.738) 34(-2,-7.738) 35(-1.5,-7.738) 36(-1,-7.738) 37(-0.5,-7.738) 38(0,-7.738) 39(0.5,-7.738) 40(1,-7.738) 41(1.5,-7.738) 42(2,-7.738) 43(2.5,-7.738) 44(3,-7.738) 45(3.5,-7.738) 46(4,-7.738) 47(4.5,-7.738) 48(5,-7.738) 49(5.5,-7.738) 50(6,-7.738) 76(6,7.738) 77(5.5,7.738) 78(5,7.738) 79(4.5,7.738) 80(4,7.738) 81(3.5,7.738) 82(3,7.738) 83(2.5,7.738) 84(2,7.738) 85(1.5,7.738) 86(1,7.738) 87(0.5,7.738) 88(0,7.738) 89(-0.5,7.738) 90(-1,7.738) 91(-1.5,7.738) 92(-2,7.738) 93(-2.5,7.738) 94(-3,7.738) 95(-3.5,7.738) 96(-4,7.738) 97(-4.5,7.738) 98(-5,7.738) 99(-5.5,7.738) 100(-6,7.738)
  silkscreen extent -8.35,-6.65 6.65,6.87, body extent -8.1,-8.1 8.1,8.1, height 1.6
RES_ERA2AEB680X [mm]
  rect 0.475x0.5 smd: 1(-0.512,0) 2(0.512,0)
RES_ERA2ARB103X [mm]
  rect 0.475x0.5 smd: 1(-0.512,0) 2(0.512,0)
RES_ERJ2RKF22R0X [mm]
  rect 0.475x0.5 smd: 1(-0.512,0) 2(0.512,0)
  body extent -0.5,-0.25 0.5,0.25, height 0.35
RESC1005X40N [mm]
  rect 0.56x0.6 smd: 1(-0.435,0) 2(0.435,0)
  body extent -0.5,-0.25 0.5,0.25, height 0.35
RESC1005X40X25LL05T05 [mm] "Chip Resistor, 2-Leads, Body 1.05x0.55mm, IPC High Density"
  rect 0.45x0.45 smd: 1(-0.4,0) 2(0.4,0)
  body extent -0.53,-0.28 0.53,0.28, height 0.4
RESC1005X40X25ML05T10 [mm] "Chip Resistor, 2-Leads, Body 1.00x0.50mm, IPC Low Density"
  rect 0.7x0.65 smd: 1(-0.475,0) 2(0.475,0)
  body extent -0.53,-0.27 0.53,0.28, height 0.4
RESC1005X40X25NL05T10 [mm] "Chip Resistor, 2-Leads, Body 1.00x0.50mm, IPC Medium Density"
  rect 0.6x0.55 smd: 1(-0.425,0) 2(0.425,0)
  body extent -0.53,-0.27 0.53,0.28, height 0.4
RGT0016C_V [mm] "QFN, 16-Leads, Body 3x3mm, Pitch 0.5mm, Thermal Pad 1.65x1.65mm"
  rrect40% 0.6x0.25 smd: 1(-1.4,0.75) 2(-1.4,0.25) 3(-1.4,-0.25) 4(-1.4,-0.75) 9(1.4,-0.75) 10(1.4,-0.25) 11(1.4,0.25) 12(1.4,0.75)
  rrect40% 0.25x0.6 smd: 5(-0.75,-1.4) 6(-0.25,-1.4) 7(0.25,-1.4) 8(0.75,-1.4) 13(0.75,1.4) 14(0.25,1.4) 15(-0.25,1.4) 16(-0.75,1.4)
  rrect6% 1.55x1.55 on Top Paste: 17(0,0)
  rrect6% 1.7x1.7 smd paste-0.85: 17(0,0)
  silkscreen extent -2.35,-1.57 1.57,1.58, body extent -1.5,-1.5 1.5,1.5, height 1
SON50P200X200X80-9N [mm]
  rrect25% 0.76x0.27 smd: 1(-0.985,0.75) 2(-0.985,0.25) 3(-0.985,-0.25) 4(-0.985,-0.75) 5(0.985,-0.75) 6(0.985,-0.25) 7(0.985,0.25) 8(0.985,0.75)
  rect 0.9x1.3 smd paste-2: 9(0,0)
  silkscreen extent -2.04,-1.2 1.05,1.2, body extent -1,-1 1,1, height 0.8
SOT50P160X60-8N [mm]
  rect 0.66x0.32 smd mask+0.05: 1(-0.735,0.75) 2(-0.735,0.25) 3(-0.735,-0.25) 4(-0.735,-0.75) 5(0.735,-0.75) 6(0.735,-0.25) 7(0.735,0.25) 8(0.735,0.75)
  silkscreen extent -1.7,-1.05 0.09,1.05, body extent -0.8,-1.05 0.8,1.05, height 0.6
SOT95P230X100-3N [mm]
  rect 1.05x0.6 smd: 1(-1.1,0.95) 2(-1.1,-0.95) 3(1.1,0)
  silkscreen extent -1.63,-1.45 0.23,1.5, body extent -1.2,-1.45 1.2,1.45, height 0.95
ST67W611M1A6BTR [mm]
  rect 0.847x0.847 smd: 1(-5.386,1.945) 2(-5.386,0.675) 3(-5.386,-0.595) 4(-5.386,-1.865) 5(-5.386,-3.135) 6(-5.386,-4.405) 7(-5.386,-5.675) 8(-5.386,-6.945) 9(-4.115,-8.216) 10(-2.845,-8.216) 11(-1.575,-8.216) 12(-0.305,-8.216) 13(0.965,-8.216) 14(2.235,-8.216) 15(3.505,-8.216) 16(4.775,-8.216) 17(6.046,-6.945) 18(6.046,-5.675) 19(6.046,-4.405) 20(6.046,-3.135) 21(6.046,-1.865) 22(6.046,-0.595) 23(6.046,0.675) 24(6.046,1.945) 25(4.775,3.216) 26(3.505,3.216) 27(2.235,3.216) 28(0.965,3.216) 29(-0.305,3.216) 30(-1.575,3.216) 31(-2.845,3.216) 32(-4.115,3.216)
  rect 3x3 smd: 33(-1.32,-4.15) 34(1.98,-4.15) 35(1.98,-0.85) 36(-1.32,-0.85)
  silkscreen extent -6.47,1.9 6.47,8.64, body extent -5.85,-8.64 6.43,8.64, height 2.4
SW_TS-1187A-B-A-B [mm]
  rect 1x0.75 smd: A(-3,1.875) B(3,1.875) C(-3,-1.875) D(3,-1.875)
  silkscreen extent -4.35,-2.55 2.55,2.55
TP_5021 [mm]
  round 1.53 hole 1.02: TP(0,0)
  silkscreen extent -1.27,-0.22 1.27,0.22, body extent -1.27,-0.22 1.27,0.22, height 5.08
TSSOP-ST14_N [mm] "TSOP, 14-Leads, Body 5x4.4mm, Pitch 0.65mm, IPC Medium Density"
  oval 1.7x0.35 smd: 1(-2.85,1.95) 2(-2.85,1.3) 3(-2.85,0.65) 4(-2.85,0) 5(-2.85,-0.65) 6(-2.85,-1.3) 7(-2.85,-1.95) 8(2.85,-1.95) 9(2.85,-1.3) 10(2.85,-0.65) 11(2.85,0) 12(2.85,0.65) 13(2.85,1.3) 14(2.85,1.95)
  silkscreen extent -2.97,-2.55 1.6,2.8, body extent -2.25,-2.55 2.25,2.55, height 1.2

## Part data
C1_EN1: library part EMG_R5_C1_EN1, "CAP CER 0.1UF 16V X5R 0402", Capacitance=100nF, Case Code (Imperial)=0402, Case Code (Metric)=1005, Dielectric=X5R, Max Operating Temperature=85°C, Min Operating Temperature=-55°C, Package Quantity=1, Tolerance=10%, Voltage=16V, Case/Package=0402, Construction=Flat, Controlled Revision="R5 2026-09-16; project-local frozen symbol/footprint", Depth=0.5mm, Height=0.5mm, Lead Free="Lead Free", Length=1mm, Mount="Surface Mount", Packaging="Tape and Reel", Radiation Hardening=No, REACH SVHC="No SVHC", RoHS Compliant=Yes, Series=GRM, Size=0.5mm, Termination=SMD/SMT, Thickness=0.022inch, Voltage Rating=16V, Voltage Rating (DC)=16V, Width=0.02inch
C1_MCU: library part EMG_R5_C1_MCU, "CAP CER 0.1UF 16V X5R 0402", Capacitance=100nF, Case Code (Imperial)=0402, Case Code (Metric)=1005, Dielectric=X5R, Max Operating Temperature=85°C, Min Operating Temperature=-55°C, Package Quantity=1, Tolerance=10%, Voltage=16V, Case/Package=0402, Construction=Flat, Controlled Revision="R5 2026-09-16; project-local frozen symbol/footprint", Depth=0.5mm, Height=0.5mm, Lead Free="Lead Free", Length=1mm, Mount="Surface Mount", Packaging="Tape and Reel", Radiation Hardening=No, REACH SVHC="No SVHC", RoHS Compliant=Yes, Series=GRM, Size=0.5mm, Termination=SMD/SMT, Thickness=0.022inch, Voltage Rating=16V, Voltage Rating (DC)=16V, Width=0.02inch
C2_EN1: library part EMG_R5_C2_EN1, "CAP CER 0.033UF 16V X7R 0402", Capacitance="33 nF", Manufacturer=YAGEO, Package=CC0402, Temperature="-55°C to +125°C", Temperature Characteristic=X7R, Temperature Coefficient=30ppm/°C, Temperature Range High=+125°C, Temperature Range Low=-55°C, Tolerance=0.1, Voltage Rating="16 V", Automotive=No, Automotive Grade=NA, Category=Cap, ComponentLink2Description=Datasheet, ComponentLink2URL=http://www.yageo.com/documents/recent/UPY-GP_NP0_16V-to-50V_16.pdf, Controlled Revision="R5 2026-09-16; project-local frozen symbol/footprint", Device Class L1="Passive Components", Device Class L2=Capacitors, Device Class L3="Ceramic Capacitors", Digikey Description="CAP CER 0.033UF 16V X7R 0402", Footprint Url=http://www.yageo.com/exep/pages/download/literatures/UPY-C_GEN_24.pdf, Height=0.55mm, Ipc Land Pattern Name=CAPC10050X50, Lead Free=Yes, Manufacturer Part Number=CC0402KRX7R7BB333, Material=Ceramic, Mouser Description="Multilayer Ceramic Capacitors MLCC - SMD/SMT 33nF 16V X7R 10%", Octopart=https://octopart.com/cc0402krx7r7bb333-yageo-9289202, RoHS=TRUE
C2_MCU: library part EMG_R5_C2_MCU, "Murata GRM155C71C105KE11D: 1 uF 16 V X7S +/-10%, 0402/1005 metric", Capacitance="1 uF", Dielectric=X7S, Manufacturer=Murata, Manufacturer Part Number=GRM155C71C105KE11D, Package="0402 / 1005 metric", Tolerance=+/-10%, Voltage Rating="16 V", Check_prices=https://www.snapeda.com/parts/GRM155C71C105KE11D/Murata/view-part/?ref=eda, Controlled Revision="R5 2026-09-16; project-local frozen symbol/footprint", MF=Murata, MP=GRM155C71C105KE11D, SnapEDA_Link=https://www.snapeda.com/parts/GRM155C71C105KE11D/Murata/view-part/?ref=snap
C3_EN1: library part EMG_R5_C3_EN1, "CAP CER 0.33UF 10V X5R 0402", Capacitance="330 nF", Manufacturer=YAGEO, Package=CC0402, Temperature="-55°C to +125°C", Temperature Characteristic=X5R, Temperature Coefficient=30ppm/°C, Temperature Range High=+125°C, Temperature Range Low=-55°C, Tolerance=0.1, Voltage Rating="10 V", Automotive=No, Automotive Grade=NA, Category=Cap, ComponentLink2Description=Datasheet, ComponentLink2URL=http://www.yageo.com/documents/recent/UPY-GP_NP0_16V-to-50V_16.pdf, Controlled Revision="R5 2026-09-16; project-local frozen symbol/footprint", Device Class L1="Passive Components", Device Class L2=Capacitors, Device Class L3="Ceramic Capacitors", Digikey Description="CAP CER 0.33UF 10V X5R 0402", Footprint Url=http://www.yageo.com/exep/pages/download/literatures/UPY-C_GEN_24.pdf, Height=0.55mm, Ipc Land Pattern Name=CAPC10050X50, Lead Free=Yes, Manufacturer Part Number=CC0402KRX5R6BB334, Material=Ceramic, Mouser Description="0402 330 nF 10 V ±10 % Tolerance X5R SMT Multilayer Ceramic Capacitor", Octopart=https://octopart.com/cc0402krx5r6bb334-yageo-21548561, RoHS=TRUE
C3_MCU: library part EMG_R5_C3_MCU, "CAP CER 0.1UF 16V X5R 0402", Capacitance=100nF, Case Code (Imperial)=0402, Case Code (Metric)=1005, Dielectric=X5R, Max Operating Temperature=85°C, Min Operating Temperature=-55°C, Package Quantity=1, Tolerance=10%, Voltage=16V, Case/Package=0402, Construction=Flat, Controlled Revision="R5 2026-09-16; project-local frozen symbol/footprint", Depth=0.5mm, Height=0.5mm, Lead Free="Lead Free", Length=1mm, Mount="Surface Mount", Packaging="Tape and Reel", Radiation Hardening=No, REACH SVHC="No SVHC", RoHS Compliant=Yes, Series=GRM, Size=0.5mm, Termination=SMD/SMT, Thickness=0.022inch, Voltage Rating=16V, Voltage Rating (DC)=16V, Width=0.02inch
C4_MCU: library part EMG_R5_C4_MCU, "Murata GRM155C71C105KE11D: 1 uF 16 V X7S +/-10%, 0402/1005 metric", Capacitance="1 uF", Dielectric=X7S, Manufacturer=Murata, Manufacturer Part Number=GRM155C71C105KE11D, Package="0402 / 1005 metric", Tolerance=+/-10%, Voltage Rating="16 V", Check_prices=https://www.snapeda.com/parts/GRM155C71C105KE11D/Murata/view-part/?ref=eda, Controlled Revision="R5 2026-09-16; project-local frozen symbol/footprint", MF=Murata, MP=GRM155C71C105KE11D, SnapEDA_Link=https://www.snapeda.com/parts/GRM155C71C105KE11D/Murata/view-part/?ref=snap
C_ADC1: library part EMG_R5_C_ADC1, "Chip Multilayer Ceramic Capacitors for General Purpose, 0402, 10000pF, C0G, 30ppm/°C, 5%, 25V", Controlled Revision="R5 2026-09-16; project-local frozen symbol/footprint"
C_ADC2: library part EMG_R5_C_ADC2, "Chip Multilayer Ceramic Capacitors for General Purpose, 0402, 10000pF, C0G, 30ppm/°C, 5%, 25V", Controlled Revision="R5 2026-09-16; project-local frozen symbol/footprint"
C_ADC3: library part EMG_R5_C_ADC3, "Chip Multilayer Ceramic Capacitors for General Purpose, 0402, 10000pF, C0G, 30ppm/°C, 5%, 25V", Controlled Revision="R5 2026-09-16; project-local frozen symbol/footprint"
C_ADC4: library part EMG_R5_C_ADC4, "Chip Multilayer Ceramic Capacitors for General Purpose, 0402, 10000pF, C0G, 30ppm/°C, 5%, 25V", Controlled Revision="R5 2026-09-16; project-local frozen symbol/footprint"
C_ADC5: library part EMG_R5_C_ADC5, "Chip Multilayer Ceramic Capacitors for General Purpose, 0402, 10000pF, C0G, 30ppm/°C, 5%, 25V", Controlled Revision="R5 2026-09-16; project-local frozen symbol/footprint"
C_BAT: library part EMG_R5_C_BAT, "10 µF ±10% 25V Ceramic Capacitor X7S 0805 (2012 Metric)", Controlled Revision="R5 2026-09-16; project-local frozen symbol/footprint"
C_IN_: library part EMG_R5_C_IN_, "Murata GRM155C71C105KE11D: 1 uF 16 V X7S +/-10%, 0402/1005 metric", Capacitance="1 uF", Dielectric=X7S, Manufacturer=Murata, Package="0402 / 1005 metric", Tolerance=+/-10%, Voltage Rating="16 V", Check_prices=https://www.snapeda.com/parts/GRM155C71C105KE11D/Murata/view-part/?ref=eda, Controlled Revision="R5 2026-09-16; project-local frozen symbol/footprint", Manufacturer Part Number=GRM155C71C105KE11D, MF=Murata, MP=GRM155C71C105KE11D, SnapEDA_Link=https://www.snapeda.com/parts/GRM155C71C105KE11D/Murata/view-part/?ref=snap
C_MCU_BULK: library part EMG_R5_C_MCU_BULK, "10 µF ±10% 25V Ceramic Capacitor X7S 0805 (2012 Metric)", Controlled Revision="R5 2026-09-16; project-local frozen symbol/footprint"
C_MCU_VDD1: library part EMG_R5_C_MCU_VDD1, "CAP CER 0.1UF 16V X5R 0402", Capacitance=100nF, Case Code (Imperial)=0402, Case Code (Metric)=1005, Dielectric=X5R, Max Operating Temperature=85°C, Min Operating Temperature=-55°C, Package Quantity=1, Tolerance=10%, Voltage=16V, Case/Package=0402, Construction=Flat, Controlled Revision="R5 2026-09-16; project-local frozen symbol/footprint", Depth=0.5mm, Height=0.5mm, Lead Free="Lead Free", Length=1mm, Mount="Surface Mount", Packaging="Tape and Reel", Radiation Hardening=No, REACH SVHC="No SVHC", RoHS Compliant=Yes, Series=GRM, Size=0.5mm, Termination=SMD/SMT, Thickness=0.022inch, Voltage Rating=16V, Voltage Rating (DC)=16V, Width=0.02inch
C_MCU_VDD2: library part EMG_R5_C_MCU_VDD2, "CAP CER 0.1UF 16V X5R 0402", Capacitance=100nF, Case Code (Imperial)=0402, Case Code (Metric)=1005, Dielectric=X5R, Max Operating Temperature=85°C, Min Operating Temperature=-55°C, Package Quantity=1, Tolerance=10%, Voltage=16V, Case/Package=0402, Construction=Flat, Controlled Revision="R5 2026-09-16; project-local frozen symbol/footprint", Depth=0.5mm, Height=0.5mm, Lead Free="Lead Free", Length=1mm, Mount="Surface Mount", Packaging="Tape and Reel", Radiation Hardening=No, REACH SVHC="No SVHC", RoHS Compliant=Yes, Series=GRM, Size=0.5mm, Termination=SMD/SMT, Thickness=0.022inch, Voltage Rating=16V, Voltage Rating (DC)=16V, Width=0.02inch
C_MCU_VDD3: library part EMG_R5_C_MCU_VDD3, "CAP CER 0.1UF 16V X5R 0402", Capacitance=100nF, Case Code (Imperial)=0402, Case Code (Metric)=1005, Dielectric=X5R, Max Operating Temperature=85°C, Min Operating Temperature=-55°C, Package Quantity=1, Tolerance=10%, Voltage=16V, Case/Package=0402, Construction=Flat, Controlled Revision="R5 2026-09-16; project-local frozen symbol/footprint", Depth=0.5mm, Height=0.5mm, Lead Free="Lead Free", Length=1mm, Mount="Surface Mount", Packaging="Tape and Reel", Radiation Hardening=No, REACH SVHC="No SVHC", RoHS Compliant=Yes, Series=GRM, Size=0.5mm, Termination=SMD/SMT, Thickness=0.022inch, Voltage Rating=16V, Voltage Rating (DC)=16V, Width=0.02inch
C_MCU_VDD4: library part EMG_R5_C_MCU_VDD4, "CAP CER 0.1UF 16V X5R 0402", Capacitance=100nF, Case Code (Imperial)=0402, Case Code (Metric)=1005, Dielectric=X5R, Max Operating Temperature=85°C, Min Operating Temperature=-55°C, Package Quantity=1, Tolerance=10%, Voltage=16V, Case/Package=0402, Construction=Flat, Controlled Revision="R5 2026-09-16; project-local frozen symbol/footprint", Depth=0.5mm, Height=0.5mm, Lead Free="Lead Free", Length=1mm, Mount="Surface Mount", Packaging="Tape and Reel", Radiation Hardening=No, REACH SVHC="No SVHC", RoHS Compliant=Yes, Series=GRM, Size=0.5mm, Termination=SMD/SMT, Thickness=0.022inch, Voltage Rating=16V, Voltage Rating (DC)=16V, Width=0.02inch
C_MCU_VDD5: library part EMG_R5_C_MCU_VDD5, "CAP CER 0.1UF 16V X5R 0402", Capacitance=100nF, Case Code (Imperial)=0402, Case Code (Metric)=1005, Dielectric=X5R, Max Operating Temperature=85°C, Min Operating Temperature=-55°C, Package Quantity=1, Tolerance=10%, Voltage=16V, Case/Package=0402, Construction=Flat, Controlled Revision="R5 2026-09-16; project-local frozen symbol/footprint", Depth=0.5mm, Height=0.5mm, Lead Free="Lead Free", Length=1mm, Mount="Surface Mount", Packaging="Tape and Reel", Radiation Hardening=No, REACH SVHC="No SVHC", RoHS Compliant=Yes, Series=GRM, Size=0.5mm, Termination=SMD/SMT, Thickness=0.022inch, Voltage Rating=16V, Voltage Rating (DC)=16V, Width=0.02inch
C_NRST: library part EMG_R5_C_NRST, "CAP CER 0.1UF 16V X5R 0402", Capacitance=100nF, Case Code (Imperial)=0402, Case Code (Metric)=1005, Dielectric=X5R, Max Operating Temperature=85°C, Min Operating Temperature=-55°C, Package Quantity=1, Tolerance=10%, Voltage=16V, Case/Package=0402, Construction=Flat, Controlled Revision="R5 2026-09-16; project-local frozen symbol/footprint", Depth=0.5mm, Height=0.5mm, Lead Free="Lead Free", Length=1mm, Mount="Surface Mount", Packaging="Tape and Reel", Radiation Hardening=No, REACH SVHC="No SVHC", RoHS Compliant=Yes, Series=GRM, Size=0.5mm, Termination=SMD/SMT, Thickness=0.022inch, Voltage Rating=16V, Voltage Rating (DC)=16V, Width=0.02inch
C_OUT_: library part EMG_R5_C_OUT_, "10 µF ±10% 25V Ceramic Capacitor X7S 0805 (2012 Metric)", Controlled Revision="R5 2026-09-16; project-local frozen symbol/footprint"
C_UV_BYPASS: library part EMG_R5_C_UV_BYPASS, "CAP CER 0.1UF 16V X5R 0402", Capacitance=100nF, Case Code (Imperial)=0402, Case Code (Metric)=1005, Dielectric=X5R, Max Operating Temperature=85°C, Min Operating Temperature=-55°C, Package Quantity=1, Tolerance=10%, Voltage=16V, Case/Package=0402, Construction=Flat, Controlled Revision="R5 2026-09-16; project-local frozen symbol/footprint", Depth=0.5mm, Height=0.5mm, Lead Free="Lead Free", Length=1mm, Mount="Surface Mount", Packaging="Tape and Reel", Radiation Hardening=No, REACH SVHC="No SVHC", RoHS Compliant=Yes, Series=GRM, Size=0.5mm, Termination=SMD/SMT, Thickness=0.022inch, Voltage Rating=16V, Voltage Rating (DC)=16V, Width=0.02inch
C_VBAT: library part EMG_R5_C_VBAT, "CAP CER 0.1UF 16V X5R 0402", Capacitance=100nF, Case Code (Imperial)=0402, Case Code (Metric)=1005, Dielectric=X5R, Max Operating Temperature=85°C, Min Operating Temperature=-55°C, Package Quantity=1, Tolerance=10%, Voltage=16V, Case/Package=0402, Construction=Flat, Controlled Revision="R5 2026-09-16; project-local frozen symbol/footprint", Depth=0.5mm, Height=0.5mm, Lead Free="Lead Free", Length=1mm, Mount="Surface Mount", Packaging="Tape and Reel", Radiation Hardening=No, REACH SVHC="No SVHC", RoHS Compliant=Yes, Series=GRM, Size=0.5mm, Termination=SMD/SMT, Thickness=0.022inch, Voltage Rating=16V, Voltage Rating (DC)=16V, Width=0.02inch
C_VBUS: library part EMG_R5_C_VBUS, "Murata GRM155C71C105KE11D: 1 uF 16 V X7S +/-10%, 0402/1005 metric", Capacitance="1 uF", Dielectric=X7S, Manufacturer=Murata, Package="0402 / 1005 metric", Tolerance=+/-10%, Voltage Rating="16 V", Check_prices=https://www.snapeda.com/parts/GRM155C71C105KE11D/Murata/view-part/?ref=eda, Controlled Revision="R5 2026-09-16; project-local frozen symbol/footprint", Manufacturer Part Number=GRM155C71C105KE11D, MF=Murata, MP=GRM155C71C105KE11D, SnapEDA_Link=https://www.snapeda.com/parts/GRM155C71C105KE11D/Murata/view-part/?ref=snap
C_VDDUSB: library part EMG_R5_C_VDDUSB, "CAP CER 0.1UF 16V X5R 0402", Capacitance=100nF, Case Code (Imperial)=0402, Case Code (Metric)=1005, Dielectric=X5R, Max Operating Temperature=85°C, Min Operating Temperature=-55°C, Package Quantity=1, Tolerance=10%, Voltage=16V, Case/Package=0402, Construction=Flat, Controlled Revision="R5 2026-09-16; project-local frozen symbol/footprint", Depth=0.5mm, Height=0.5mm, Lead Free="Lead Free", Length=1mm, Mount="Surface Mount", Packaging="Tape and Reel", Radiation Hardening=No, REACH SVHC="No SVHC", RoHS Compliant=Yes, Series=GRM, Size=0.5mm, Termination=SMD/SMT, Thickness=0.022inch, Voltage Rating=16V, Voltage Rating (DC)=16V, Width=0.02inch
C_WIFI_BULK: library part EMG_R5_C_WIFI_BULK, "Chip Multilayer Ceramic Capacitors for General Purpose, 0805, 47uF, X5R, 15%, 20%, 6.3V", Capacitance=47uF, Case Code (Imperial)=0805, Case Code (Metric)=2012, Max Operating Temperature=85°C, Min Operating Temperature=-55°C, Tolerance=20%, Voltage Rating=6.3V, Assembly PROTO_1="Not Fitted", Assembly PROTO_1_REMOTE_NTC="Not Fitted", Case/Package=0805, Controlled Revision="R5 2026-09-16; project-local frozen symbol/footprint", Length=0.079inch, Mount="Surface Mount", Packaging="Tape and Reel", Release Note="Optional 47 uF radio bulk; retained footprint, initial prototype DNP", Thickness=0.037inch, Width=0.049inch
C_WIFI_EN: library part EMG_R5_C_WIFI_EN, "CAP CER 0.1UF 16V X5R 0402", Capacitance=100nF, Case Code (Imperial)=0402, Case Code (Metric)=1005, Dielectric=X5R, Max Operating Temperature=85°C, Min Operating Temperature=-55°C, Package Quantity=1, Tolerance=10%, Voltage=16V, Case/Package=0402, Construction=Flat, Controlled Revision="R5 2026-09-16; project-local frozen symbol/footprint", Depth=0.5mm, Height=0.5mm, Lead Free="Lead Free", Length=1mm, Mount="Surface Mount", Packaging="Tape and Reel", Radiation Hardening=No, REACH SVHC="No SVHC", RoHS Compliant=Yes, Series=GRM, Size=0.5mm, Termination=SMD/SMT, Thickness=0.022inch, Voltage Rating=16V, Voltage Rating (DC)=16V, Width=0.02inch
C_WIFI_VDD33: library part EMG_R5_C_WIFI_VDD33, "10 µF ±10% 25V Ceramic Capacitor X7S 0805 (2012 Metric)", Controlled Revision="R5 2026-09-16; project-local frozen symbol/footprint"
C_WIFI_VDD33_HF: library part EMG_R5_C_WIFI_VDD33_HF, "CAP CER 0.1UF 16V X5R 0402", Capacitance=100nF, Case Code (Imperial)=0402, Case Code (Metric)=1005, Dielectric=X5R, Max Operating Temperature=85°C, Min Operating Temperature=-55°C, Package Quantity=1, Tolerance=10%, Voltage=16V, Case/Package=0402, Construction=Flat, Controlled Revision="R5 2026-09-16; project-local frozen symbol/footprint", Depth=0.5mm, Height=0.5mm, Lead Free="Lead Free", Length=1mm, Mount="Surface Mount", Packaging="Tape and Reel", Radiation Hardening=No, REACH SVHC="No SVHC", RoHS Compliant=Yes, Series=GRM, Size=0.5mm, Termination=SMD/SMT, Thickness=0.022inch, Voltage Rating=16V, Voltage Rating (DC)=16V, Width=0.02inch
C_WIFI_VDDIO1: library part EMG_R5_C_WIFI_VDDIO1, "10 µF ±10% 25V Ceramic Capacitor X7S 0805 (2012 Metric)", Controlled Revision="R5 2026-09-16; project-local frozen symbol/footprint"
C_WIFI_VDDIO1_HF: library part EMG_R5_C_WIFI_VDDIO1_HF, "CAP CER 0.1UF 16V X5R 0402", Capacitance=100nF, Case Code (Imperial)=0402, Case Code (Metric)=1005, Dielectric=X5R, Max Operating Temperature=85°C, Min Operating Temperature=-55°C, Package Quantity=1, Tolerance=10%, Voltage=16V, Case/Package=0402, Construction=Flat, Controlled Revision="R5 2026-09-16; project-local frozen symbol/footprint", Depth=0.5mm, Height=0.5mm, Lead Free="Lead Free", Length=1mm, Mount="Surface Mount", Packaging="Tape and Reel", Radiation Hardening=No, REACH SVHC="No SVHC", RoHS Compliant=Yes, Series=GRM, Size=0.5mm, Termination=SMD/SMT, Thickness=0.022inch, Voltage Rating=16V, Voltage Rating (DC)=16V, Width=0.02inch
C_WIFI_VDDIO2: library part EMG_R5_C_WIFI_VDDIO2, "10 µF ±10% 25V Ceramic Capacitor X7S 0805 (2012 Metric)", Controlled Revision="R5 2026-09-16; project-local frozen symbol/footprint"
C_WIFI_VDDIO2_HF: library part EMG_R5_C_WIFI_VDDIO2_HF, "CAP CER 0.1UF 16V X5R 0402", Capacitance=100nF, Case Code (Imperial)=0402, Case Code (Metric)=1005, Dielectric=X5R, Max Operating Temperature=85°C, Min Operating Temperature=-55°C, Package Quantity=1, Tolerance=10%, Voltage=16V, Case/Package=0402, Construction=Flat, Controlled Revision="R5 2026-09-16; project-local frozen symbol/footprint", Depth=0.5mm, Height=0.5mm, Lead Free="Lead Free", Length=1mm, Mount="Surface Mount", Packaging="Tape and Reel", Radiation Hardening=No, REACH SVHC="No SVHC", RoHS Compliant=Yes, Series=GRM, Size=0.5mm, Termination=SMD/SMT, Thickness=0.022inch, Voltage Rating=16V, Voltage Rating (DC)=16V, Width=0.02inch
C_WIFI_X32_IN: library part EMG_R5_C_WIFI_X32_IN, "DNP - 32 kHz crystal tuning capacitor; no fitted value or MPN; retain 0402 footprint", Package="0402 / 1005 metric", Assembly PROTO_1="Not Fitted", Assembly PROTO_1_REMOTE_NTC="Not Fitted", Controlled Revision="R5 2026-09-16; project-local frozen symbol/footprint", Release Note="No fitted capacitance or MPN. Qualify pF tuning if required; never fit copied 100 nF."
C_WIFI_X32_OUT: library part EMG_R5_C_WIFI_X32_OUT, "DNP - 32 kHz crystal tuning capacitor; no fitted value or MPN; retain 0402 footprint", Package="0402 / 1005 metric", Assembly PROTO_1="Not Fitted", Assembly PROTO_1_REMOTE_NTC="Not Fitted", Controlled Revision="R5 2026-09-16; project-local frozen symbol/footprint", Release Note="No fitted capacitance or MPN. Qualify pF tuning if required; never fit copied 100 nF."
CCU1: library part EMG_R5_CCU1, "CAP CER 0.1UF 16V X5R 0402", Capacitance=100nF, Case Code (Imperial)=0402, Case Code (Metric)=1005, Dielectric=X5R, Max Operating Temperature=85°C, Min Operating Temperature=-55°C, Package Quantity=1, Tolerance=10%, Voltage=16V, Case/Package=0402, Construction=Flat, Controlled Revision="R5 2026-09-16; project-local frozen symbol/footprint", Depth=0.5mm, Height=0.5mm, Lead Free="Lead Free", Length=1mm, Mount="Surface Mount", Packaging="Tape and Reel", Radiation Hardening=No, REACH SVHC="No SVHC", RoHS Compliant=Yes, Series=GRM, Size=0.5mm, Termination=SMD/SMT, Thickness=0.022inch, Voltage Rating=16V, Voltage Rating (DC)=16V, Width=0.02inch
CCU2: library part EMG_R5_CCU2, "Murata GRM155C71C105KE11D: 1 uF 16 V X7S +/-10%, 0402/1005 metric", Capacitance="1 uF", Dielectric=X7S, Manufacturer=Murata, Manufacturer Part Number=GRM155C71C105KE11D, Package="0402 / 1005 metric", Tolerance=+/-10%, Voltage Rating="16 V", Check_prices=https://www.snapeda.com/parts/GRM155C71C105KE11D/Murata/view-part/?ref=eda, Controlled Revision="R5 2026-09-16; project-local frozen symbol/footprint", MF=Murata, MP=GRM155C71C105KE11D, SnapEDA_Link=https://www.snapeda.com/parts/GRM155C71C105KE11D/Murata/view-part/?ref=snap